# EAGLE board SPATZ_Schaltung (EAGLE 9.7.0)

Size 210.18 x 89.99 mm. Coordinates in mm from the lower left corner, seen from the top.
Outline: 0,0 210.18,0 210.18,89.99 0,89.99 0,0
Copper layers (1*16): Top 0.035mm / dielectric 1.5mm / Bottom 0.035mm
Design rules "default": minimum track width 6mil, minimum drill 0.35mm, track to track 6mil, track to pad 6mil, pad to pad 6mil, via to via 6mil, smd to smd 6mil, copper to edge 40mil, drill to drill 6mil, minimum pad ring 10mil, minimum via ring 8mil, stop-mask expansion 4mil, vias tented up to drill 0mil, thermal gap 10mil

## Footprints (pad centres in the part's own frame; a part is rotated, then mirrored left to right if it is on the bottom)
BATTERY-GENERIC = drill 1.118 pad 3.15 octagon: + 2.54,0; - -2.54,0
DIODE-AXIAL = drill 1: 1 -5.08,0; 2 5.08,0
DG01D = drill 1.118 pad 3.15 octagon: + 2.54,0; - -2.54,0
28027 = drill 1.016 long: 1 -2.54,0; 2 0,0; 3 2.54,0
RESAD1016W63L850D250B = drill 0.83 pad 1.43: 1 -5.08,0; 2 5.08,0
SG90 = drill 1.016 long: 1 -2.54,0; 2 0,0; 3 2.54,0
TO220BV = drill 1.016 long: D 0,-2.54; G -2.54,-2.54; S 2.54,-2.54
TO220V = drill 1.016 long: 1 -2.54,-2.54; 2 0,-2.54; 3 2.54,-2.54

## Placement (x,y rotation side)
BAT12V_AKKU  9V  [BATTERY-GENERIC]  103.08,34.1 180 top
DFREILAUFDIODE  DIODEDIODE-AXIAL  [DIODE-AXIAL]  85.75,34.74 0 top
MPUMPE  MOTOR_DG01D  [DG01D]  74.3,51.13 270 top
PIRPIR_1  PIR-SENSOR_28027  [28027]  146.06,62.65 0 top
PIRPIR_2  PIR-SENSOR_28027  [28027]  189.22,62.11 0 top
RPULLDOWN  10k  [RESAD1016W63L850D250B]  58.1,23.7 120 top
RWIDERSTAND  100  [RESAD1016W63L850D250B]  71.14,8.97 90 top
SERVO1  SERVOSG90  [SG90]  106.95,82.93 270 top
TIRLZ44N  NMOSFET  [TO220BV]  64.32,30.88 0 top
U12_-->_5V  LM7805_TO220V  [TO220V]  105.53,44.73 0 top

## Library data of the parts
BAT12V_AKKU DFREILAUFDIODE MPUMPE PIRPIR_1 PIRPIR_2 RPULLDOWN RWIDERSTAND SERVO1 U12_-->_5V = Tinkercad
TIRLZ44N = Tinkercad; CATEGORY: Transistor; SUB-CATEGORY: MOSFET; TYPE: N-Channel

## Nets
BAT12V_AKKU+: BAT12V_AKKU.+ DFREILAUFDIODE.2 MPUMPE.+
BAT12V_AKKU-: BAT12V_AKKU.- U12_-->_5V.1
MPUMPE_-: DFREILAUFDIODE.1 MPUMPE.- TIRLZ44N.D
PIRPIR_1_GND: PIRPIR_1.3 PIRPIR_2.3 RPULLDOWN.1 SERVO1.1 TIRLZ44N.S U12_-->_5V.2
PIRPIR_1_VCC: PIRPIR_1.2 PIRPIR_2.2 SERVO1.2 U12_-->_5V.3
TIRLZ44N_G: RPULLDOWN.2 RWIDERSTAND.2 TIRLZ44N.G

## Tracks (layer width: path | path; a pad name or v marks a point on that pad's centre or on a via)
BAT12V_AKKU+  (2 unrouted)
BAT12V_AKKU-  (1 unrouted)
MPUMPE_-  (2 unrouted)
PIRPIR_1_GND  (5 unrouted)
PIRPIR_1_VCC  (3 unrouted)
TIRLZ44N_G  (2 unrouted)